# Altium PCB SAMD21_16X10_Layout.PcbDoc
Units mm, origin at the board's own origin, x right, y up, seen from the top; angles counter-clockwise.
Board outline 152.4 x 146.05 mm, 2 copper layers (Top Layer, Bottom Layer); 27 components, 42 nets, 160 pads, 66 vias.
Unrouted connection lines stored in the file: 27.
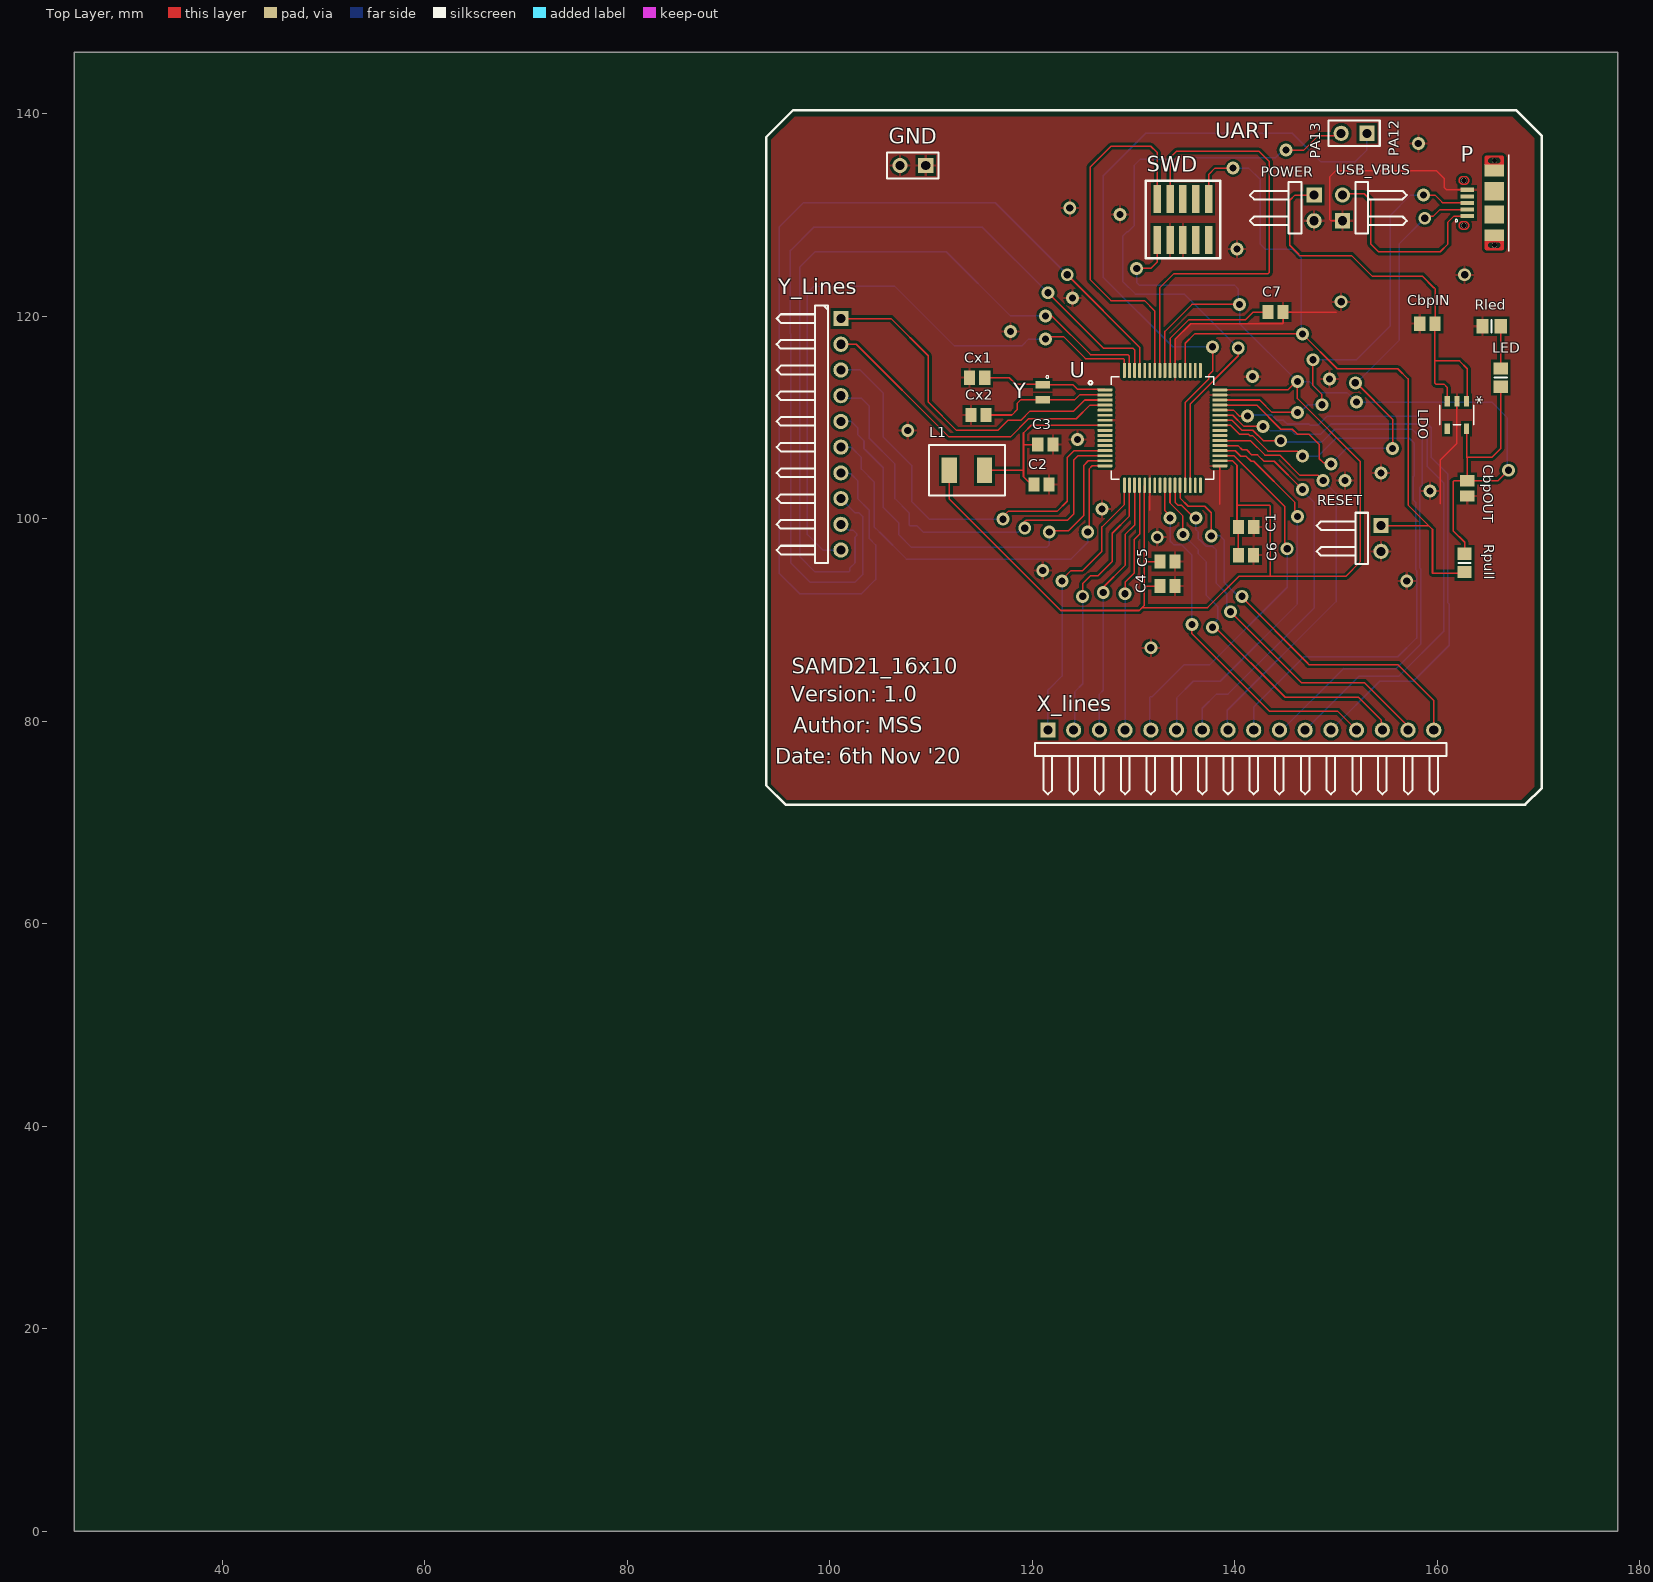
[diagram p0: Top Layer view]
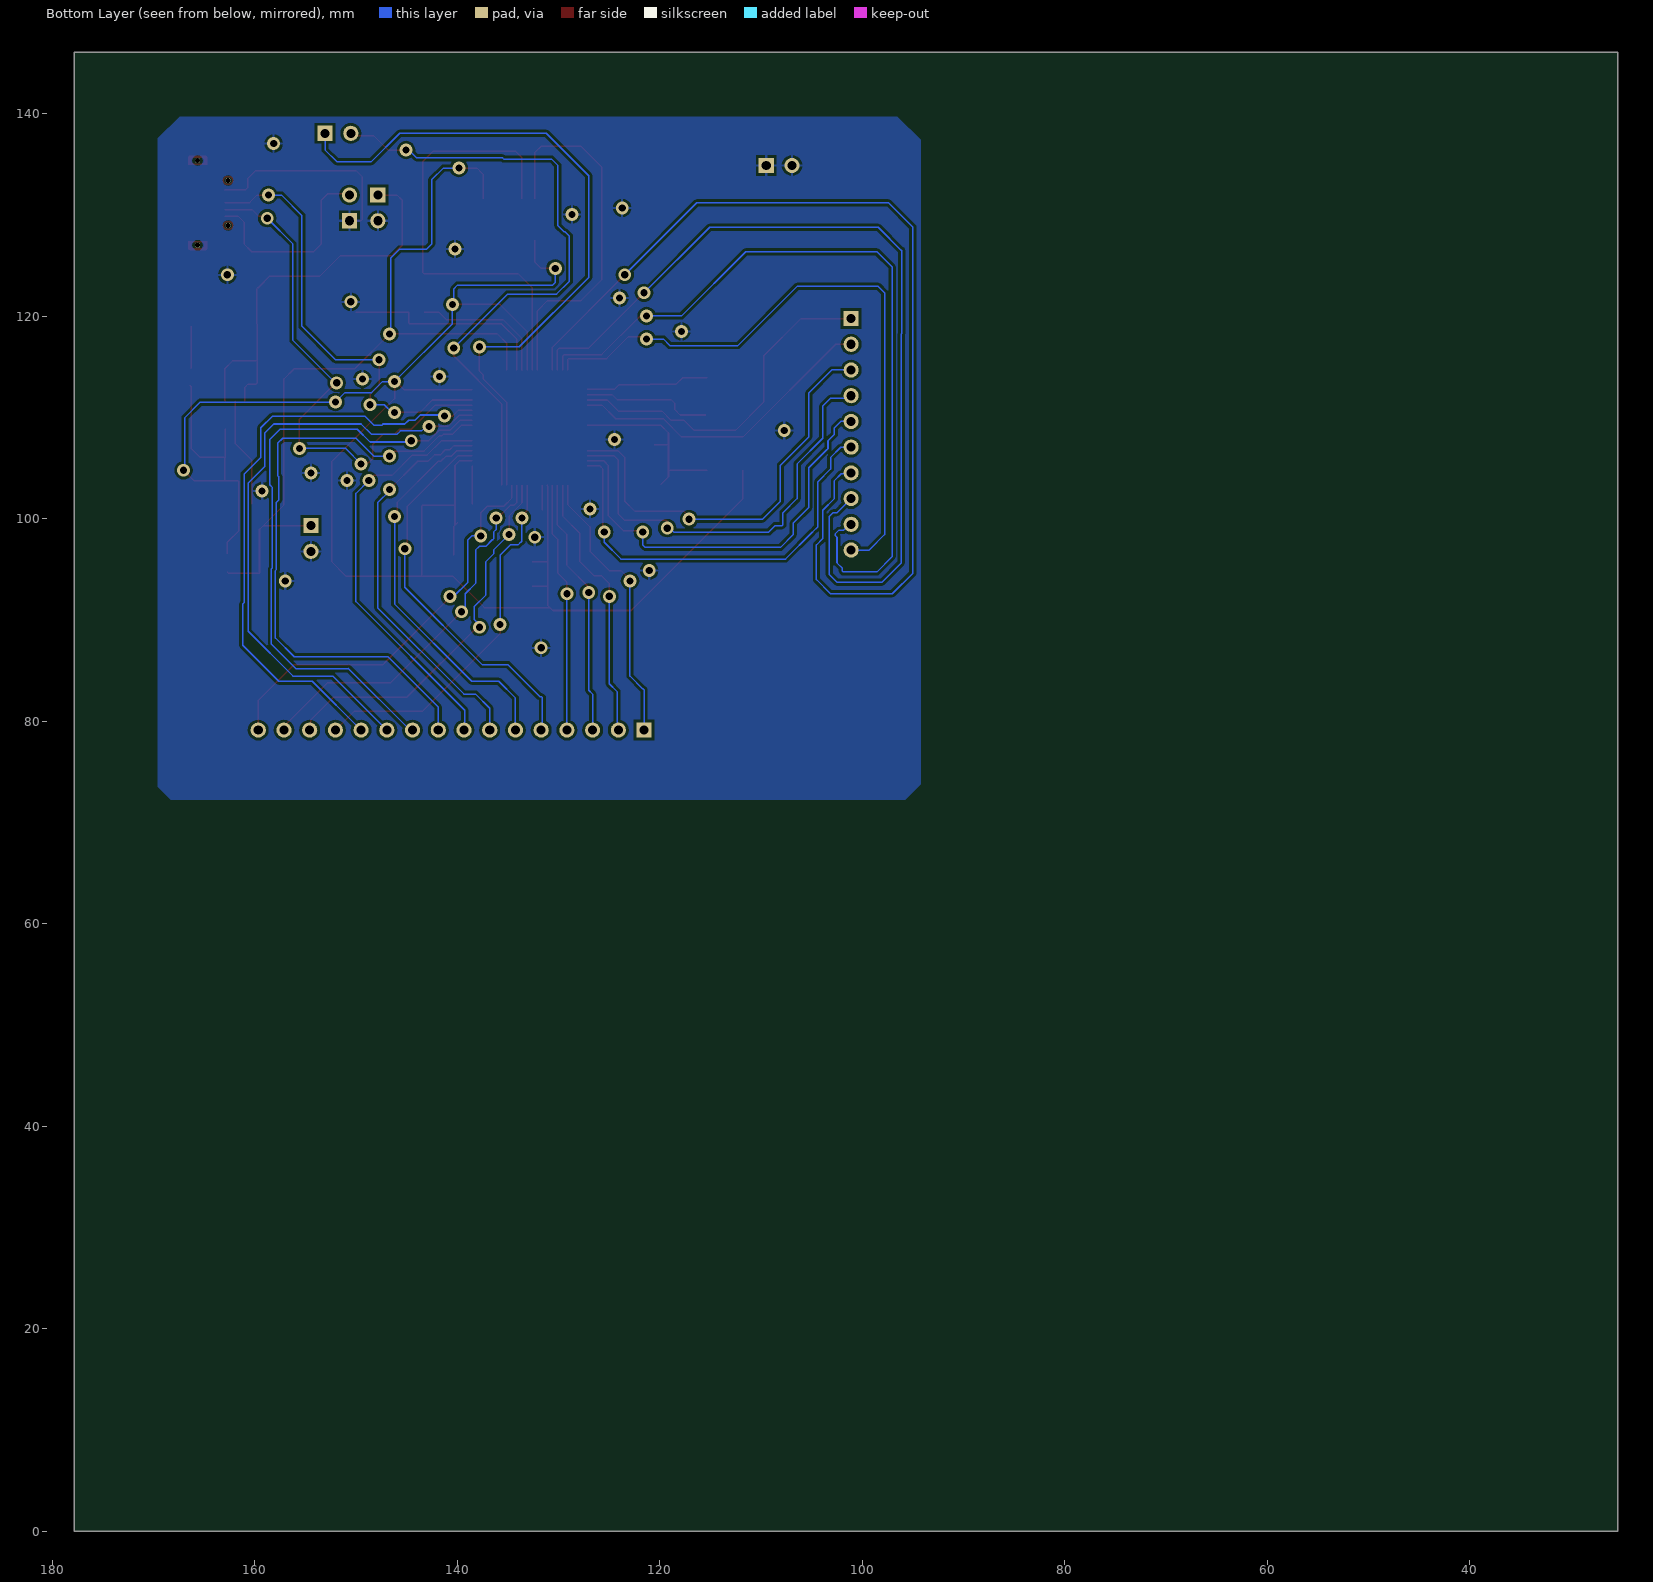
[diagram p1: Bottom Layer view, seen from below]

## Layer stack, top to bottom
Top Solder: solder mask 0.0102, Solder Resist, Dk 3.5
Top Layer: signal copper 0.0356
Dielectric 1: dielectric 0.32, FR-4, Dk 4.8
Bottom Layer: signal copper 0.0356
Bottom Solder: solder mask 0.0102, Solder Resist, Dk 3.5

## Board outline
25.4,0 177.8,0 177.8,146.05 25.4,146.05

## Design rules (kind name [scope] priority, off if disabled: settings)
Clearance [All] p1: gap=0.254 ignorepadtopadclearanceinfootprint=FALSE except(0: Arc-Hole Track-Hole SMDPad-Hole THPad-Hole Via-Hole Fill-Hole Poly-Hole Region-Hole Text-Hole)
PolygonConnect [All] p1: connectstyle=Relief reliefconductorwidth=0.254 reliefentries=4 polygonreliefangle="90 Angle" airgapwidth=0.254
RoomDefinition SAMD21_16X10_schematic [InComponentClass('SAMD21_16X10_schematic')] p1: confinementstyle=ConfineIn formatcopy=TRUE lockcomponents=FALSE outline 90.424,68.199 175.26,68.199 175.26,144.145 90.424,144.145
RoutingVias [All] p1: holewidth=0.711 width=1.27 viastyle="Through Hole" minholewidth=0.711 minwidth=1.27 maxholewidth=0.711 maxwidth=1.27
SolderMaskExpansion [All] p1: expansion=0.102 istentingtop=FALSE
Width [All] p1: maxlimit=0.254 minlimit=0.1 preferedwidth=0.254
30 further rules are at their usual default settings.

## Components (designator, comment, footprint, x,y, rotation, side; value= is the part's Value field where it differs from the comment)
C1 "Cap Pol3" C0805 141.109,99.187 r0 top value=10uF
C2 "Cap Pol3" C0805 120.904,103.378 r0 top value=100nF
C3 "Cap Pol3" C0805 121.285,107.315 r0 top value=10uF
C4 "Cap Pol3" C0805 133.35,93.345 r0 top value=100nF
C5 "Cap Pol3" C0805 133.35,95.758 r0 top value=100nF
C6 "Cap Pol3" C0805 141.097,96.393 r0 top value=100nF
C7 "Cap Pol3" C0805 144.018,120.396 r0 top value=1uF
CbpIN "Cap Pol3" C0805 159.004,119.253 r180 top value=1uF
CbpOUT "Cap Pol3" C0805 162.941,102.997 r270 top value=1uF
Cx1 "Cap Pol3" C0805 114.554,113.919 r180 top value=25pF
Cx2 "Cap Pol3" C0805 114.681,110.236 r180 top value=25pF
GND "Header 2" HDR1X2 109.474,134.874 r180 top
L1 "SRP4012TA-100M" Inductor 113.538,104.775 r180 top
LDO "AP2112K-3.3TRG1" SOT_RG1_DIO 161.925,110.236 r270 top
LED "Res Thermal" 6-0805_N 166.243,113.93 r90 top
P "0475890001" MOLEX_0475890001 165.616,131.176 r90 top
POWER "Header 2H" HDR1X2H 147.828,131.953 r270 top
RESET "Header 2H" HDR1X2H 154.432,99.314 r270 top
Rled "Res Thermal" 6-0805_N 165.354,118.999 r180 top
Rpull "Res Thermal" 6-0805_N 162.687,95.631 r270 top
SWD "FTSH-105-01-XXX-DV-K" FTSH-105-01-XXX-DV-K 134.874,129.54 r0 top
U "ATSAMD21J18A-AU" QFP80P1600X1600X120-64N 132.842,108.966 r0 top
UART "Header 2" HDR1X2 153.035,138.049 r180 top
USB_VBUS "Header 2H" HDR1X2H 150.622,129.413 r90 top
X_lines "Header 16H" HDR1X16H 121.539,79.121 r0 top
Y "ABS06-32.768KHZ-T" XTAL_ABS06-32.768KHZ-T 121.031,112.49 r270 top
Y_Lines "Header 10H" HDR1X10H 101.092,119.761 r270 top

## Footprints (in the part's own frame and the unit in brackets; to place one, negate y for a bottom-side part, rotate by r counter-clockwise, add the part's x,y. Pads: shape width x height; smd on the part's side, far side on the other; paste and mask are expansions set on the pad)
6-0805_N [mm] "Chip Resistor, Body 2.0x1.2mm, IPC Medium Density"
  rect 1.2x1.4 smd: 1(-0.9,0) 2(0.9,0)
  silkscreen extent 0,-0.6 0,0.6, body extent -1.07,-0.7 1.07,0.7, height 0.7
C0805 [mm] "Chip Capacitor, Body 2.0x1.3mm, IPC High Density"
  rect 1.1x1.4 smd: 1(-0.75,0) 2(0.75,0)
  body extent -1.1,-0.72 1.1,0.72, height 1.4
FTSH-105-01-XXX-DV-K [mil]
  rect 29x110 smd mask+2: 1(-100,-80) 2(-100,80) 3(-50,-80) 4(-50,80) 5(0,-80) 6(0,80) 7(50,-80) 8(50,80) 9(100,-80) 10(100,80)
  silkscreen extent -145,-150 145,150
HDR1X2 [mm] "Connector; Header; 2 Position"
  rect 1.5x1.5 hole 0.9: 1(0,0)
  round 1.5 hole 0.9: 2(2.54,0)
  silkscreen extent -1.27,-1.27 3.81,1.27
HDR1X2H [mm] "Connector; Header; 2 Position; Right Angle"
  rect 1.5x1.5 hole 0.9: 1(0,0)
  round 1.5 hole 0.9: 2(2.54,0)
  silkscreen extent -1.27,-6.35 3.81,-1.27
HDR1X10H [mm] "Connector; Header; 10 Position; Right Angle"
  rect 1.5x1.5 hole 0.9: 1(0,0)
  round 1.5 hole 0.9: 2(2.54,0) 3(5.08,0) 4(7.62,0) 5(10.16,0) 6(12.7,0) 7(15.24,0) 8(17.78,0) 9(20.32,0) 10(22.86,0)
  silkscreen extent -1.27,-6.35 24.13,-1.27
HDR1X16H [mm] "Connector; Header; 16 Position; Right Angle"
  rect 1.5x1.5 hole 0.9: 1(0,0)
  round 1.5 hole 0.9: 2(2.54,0) 3(5.08,0) 4(7.62,0) 5(10.16,0) 6(12.7,0) 7(15.24,0) 8(17.78,0) 9(20.32,0) 10(22.86,0) 11(25.4,0) 12(27.94,0) 13(30.48,0) 14(33.02,0) 15(35.56,0) 16(38.1,0)
  silkscreen extent -1.27,-6.35 39.37,-1.27
Inductor [mm]
  rect 1.5x2.5 smd: 1(-1.75,0) 2(1.75,0)
  silkscreen extent -3.75,-2.5 3.75,2.5
MOLEX_0475890001 [mm]
  rect 0.4x1.35 smd: 1(-1.3,2.675) 2(-0.65,2.675) 3(0,2.675) 4(0.65,2.675) 5(1.3,2.675)
  rect 1.175x1.9 smd: 6(-3.187,0) 9(3.187,0)
  rect 1.8x1.9 smd: 7(-1.15,0) 8(1.15,0)
  round 0.5 hole 0.5 unplated: ""(-4.175,0) ""(-2.225,3) ""(2.225,3) ""(4.175,0)
  Top Layer region: 3.875,0.35 3.875,-0.35 3.875,-0.95 3.775,-0.95 3.775,0.95 3.875,0.95
  Top Layer region: 187 vertices and 0 holes, not listed, extent 3.875,-0.95 4.675,0.95
  Top Layer region: -3.775,-0.95 -3.875,-0.95 -3.875,-0.35 -3.875,0.35 -3.875,0.95 -3.775,0.95
  Top Layer region: 2.65,2.9 2.649,2.878 2.648,2.856 2.645,2.834 2.641,2.812 2.636,2.79 2.629,2.769 2.622,2.748 2.613,2.727 2.604,2.707 2.593,2.688 2.581,2.669 2.569,2.65 2.555,2.633 2.541,2.616 2.526,2.599 2.509,2.584 2.492,2.57 2.475,2.556 2.456,2.544 2.438,2.532 2.418,2.521 2.398,2.512 2.377,2.503 2.356,2.496 2.335,2.489 2.313,2.484 2.291,2.48 2.269,2.477 2.247,2.476 2.225,2.475 2.203,2.476 2.181,2.477 2.159,2.48 2.137,2.484 2.115,2.489 2.094,2.496 2.073,2.503 2.052,2.512 2.032,2.521 2.013,2.532 1.994,2.544 1.975,2.556 1.958,2.57 1.941,2.584 1.924,2.599 1.909,2.616 1.895,2.633 1.881,2.65 1.869,2.669 1.857,2.688 1.846,2.707 1.837,2.727 1.828,2.748 1.821,2.769 1.814,2.79 1.809,2.812 1.805,2.834 1.802,2.856 1.801,2.878 1.8,2.9 1.8,3 1.9,3 1.9,2.9 1.9,2.883 1.902,2.866 1.904,2.849 1.907,2.832 1.911,2.816 1.916,2.8 1.922,2.784 1.928,2.768 1.935,2.752 1.944,2.738 1.952,2.723 1.962,2.709 1.972,2.695 1.983,2.683 1.995,2.67 2.008,2.658 2.02,2.647 2.034,2.637 2.048,2.627 2.063,2.619 2.077,2.61 2.093,2.603 2.109,2.597 2.125,2.591 2.141,2.586 2.157,2.582 2.174,2.579 2.191,2.577 2.208,2.575 2.225,2.575 2.242,2.575 2.259,2.577 2.276,2.579 2.293,2.582 2.309,2.586 2.325,2.591 2.341,2.597 2.357,2.603 2.373,2.61 2.388,2.619 2.402,2.627 2.416,2.637 2.43,2.647 2.442,2.658 2.455,2.67 2.467,2.683 2.478,2.695 2.488,2.709 2.498,2.723 2.506,2.738 2.515,2.752 2.522,2.768 2.528,2.784 2.534,2.8 2.539,2.816 2.543,2.832 2.546,2.849 2.548,2.866 2.55,2.883 2.55,2.9 2.55,3 2.65,3
  Top Layer region: 2.247,3.524 2.269,3.523 2.291,3.52 2.313,3.516 2.335,3.511 2.356,3.504 2.377,3.497 2.398,3.488 2.418,3.479 2.438,3.468 2.456,3.456 2.475,3.444 2.492,3.43 2.509,3.416 2.526,3.401 2.541,3.384 2.555,3.367 2.569,3.35 2.581,3.331 2.593,3.313 2.604,3.293 2.613,3.273 2.622,3.252 2.629,3.231 2.636,3.21 2.641,3.188 2.645,3.166 2.648,3.144 2.649,3.122 2.65,3.1 2.65,3 2.55,3 2.55,3.1 2.55,3.117 2.548,3.134 2.546,3.151 2.543,3.168 2.539,3.184 2.534,3.2 2.528,3.216 2.522,3.232 2.515,3.248 2.506,3.263 2.498,3.277 2.488,3.291 2.478,3.305 2.467,3.317 2.455,3.33 2.442,3.342 2.43,3.353 2.416,3.363 2.402,3.373 2.388,3.381 2.373,3.39 2.357,3.397 2.341,3.403 2.325,3.409 2.309,3.414 2.293,3.418 2.276,3.421 2.259,3.423 2.242,3.425 2.225,3.425 2.208,3.425 2.191,3.423 2.174,3.421 2.157,3.418 2.141,3.414 2.125,3.409 2.109,3.403 2.093,3.397 2.077,3.39 2.063,3.381 2.048,3.373 2.034,3.363 2.02,3.353 2.008,3.342 1.995,3.33 1.983,3.317 1.972,3.305 1.962,3.291 1.952,3.277 1.944,3.263 1.935,3.248 1.928,3.232 1.922,3.216 1.916,3.2 1.911,3.184 1.907,3.168 1.904,3.151 1.902,3.134 1.9,3.117 1.9,3.1 1.9,3 1.8,3 1.8,3.1 1.801,3.122 1.802,3.144 1.805,3.166 1.809,3.188 1.814,3.21 1.821,3.231 1.828,3.252 1.837,3.273 1.846,3.293 1.857,3.313 1.869,3.331 1.881,3.35 1.895,3.367 1.909,3.384 1.924,3.401 1.941,3.416 1.958,3.43 1.975,3.444 1.994,3.456 2.013,3.468 2.032,3.479 2.052,3.488 2.073,3.497 2.094,3.504 2.115,3.511 2.137,3.516 2.159,3.52 2.181,3.523 2.203,3.524 2.225,3.525
  Top Layer region: -1.8,2.9 -1.801,2.878 -1.802,2.856 -1.805,2.834 -1.809,2.812 -1.814,2.79 -1.821,2.769 -1.828,2.748 -1.837,2.727 -1.846,2.707 -1.857,2.688 -1.869,2.669 -1.881,2.65 -1.895,2.633 -1.909,2.616 -1.924,2.599 -1.941,2.584 -1.958,2.57 -1.975,2.556 -1.994,2.544 -2.013,2.532 -2.032,2.521 -2.052,2.512 -2.073,2.503 -2.094,2.496 -2.115,2.489 -2.137,2.484 -2.159,2.48 -2.181,2.477 -2.203,2.476 -2.225,2.475 -2.247,2.476 -2.269,2.477 -2.291,2.48 -2.313,2.484 -2.335,2.489 -2.356,2.496 -2.377,2.503 -2.398,2.512 -2.418,2.521 -2.438,2.532 -2.456,2.544 -2.475,2.556 -2.492,2.57 -2.509,2.584 -2.526,2.599 -2.541,2.616 -2.555,2.633 -2.569,2.65 -2.581,2.669 -2.593,2.688 -2.604,2.707 -2.613,2.727 -2.622,2.748 -2.629,2.769 -2.636,2.79 -2.641,2.812 -2.645,2.834 -2.648,2.856 -2.649,2.878 -2.65,2.9 -2.65,3 -2.55,3 -2.55,2.9 -2.55,2.883 -2.548,2.866 -2.546,2.849 -2.543,2.832 -2.539,2.816 -2.534,2.8 -2.528,2.784 -2.522,2.768 -2.515,2.752 -2.506,2.738 -2.498,2.723 -2.488,2.709 -2.478,2.695 -2.467,2.683 -2.455,2.67 -2.442,2.658 -2.43,2.647 -2.416,2.637 -2.402,2.627 -2.388,2.619 -2.373,2.61 -2.357,2.603 -2.341,2.597 -2.325,2.591 -2.309,2.586 -2.293,2.582 -2.276,2.579 -2.259,2.577 -2.242,2.575 -2.225,2.575 -2.208,2.575 -2.191,2.577 -2.174,2.579 -2.157,2.582 -2.141,2.586 -2.125,2.591 -2.109,2.597 -2.093,2.603 -2.077,2.61 -2.063,2.619 -2.048,2.627 -2.034,2.637 -2.02,2.647 -2.008,2.658 -1.995,2.67 -1.983,2.683 -1.972,2.695 -1.962,2.709 -1.952,2.723 -1.944,2.738 -1.935,2.752 -1.928,2.768 -1.922,2.784 -1.916,2.8 -1.911,2.816 -1.907,2.832 -1.904,2.849 -1.902,2.866 -1.9,2.883 -1.9,2.9 -1.9,3 -1.8,3
  Top Layer region: -2.203,3.524 -2.181,3.523 -2.159,3.52 -2.137,3.516 -2.115,3.511 -2.094,3.504 -2.073,3.497 -2.052,3.488 -2.032,3.479 -2.013,3.468 -1.994,3.456 -1.975,3.444 -1.958,3.43 -1.941,3.416 -1.924,3.401 -1.909,3.384 -1.895,3.367 -1.881,3.35 -1.869,3.331 -1.857,3.313 -1.846,3.293 -1.837,3.273 -1.828,3.252 -1.821,3.231 -1.814,3.21 -1.809,3.188 -1.805,3.166 -1.802,3.144 -1.801,3.122 -1.8,3.1 -1.8,3 -1.9,3 -1.9,3.1 -1.9,3.117 -1.902,3.134 -1.904,3.151 -1.907,3.168 -1.911,3.184 -1.916,3.2 -1.922,3.216 -1.928,3.232 -1.935,3.248 -1.944,3.263 -1.952,3.277 -1.962,3.291 -1.972,3.305 -1.983,3.317 -1.995,3.33 -2.008,3.342 -2.02,3.353 -2.034,3.363 -2.048,3.373 -2.063,3.381 -2.077,3.39 -2.093,3.397 -2.109,3.403 -2.125,3.409 -2.141,3.414 -2.157,3.418 -2.174,3.421 -2.191,3.423 -2.208,3.425 -2.225,3.425 -2.242,3.425 -2.259,3.423 -2.276,3.421 -2.293,3.418 -2.309,3.414 -2.325,3.409 -2.341,3.403 -2.357,3.397 -2.373,3.39 -2.388,3.381 -2.402,3.373 -2.416,3.363 -2.43,3.353 -2.442,3.342 -2.455,3.33 -2.467,3.317 -2.478,3.305 -2.488,3.291 -2.498,3.277 -2.506,3.263 -2.515,3.248 -2.522,3.232 -2.528,3.216 -2.534,3.2 -2.539,3.184 -2.543,3.168 -2.546,3.151 -2.548,3.134 -2.55,3.117 -2.55,3.1 -2.55,3 -2.65,3 -2.65,3.1 -2.649,3.122 -2.648,3.144 -2.645,3.166 -2.641,3.188 -2.636,3.21 -2.629,3.231 -2.622,3.252 -2.613,3.273 -2.604,3.293 -2.593,3.313 -2.581,3.331 -2.569,3.35 -2.555,3.367 -2.541,3.384 -2.526,3.401 -2.509,3.416 -2.492,3.43 -2.475,3.444 -2.456,3.456 -2.438,3.468 -2.418,3.479 -2.398,3.488 -2.377,3.497 -2.356,3.504 -2.335,3.511 -2.313,3.516 -2.291,3.52 -2.269,3.523 -2.247,3.524 -2.225,3.525
  Top Layer region: 187 vertices and 0 holes, not listed, extent -4.675,-0.95 -3.875,0.95
  silkscreen extent -4.75,-1.45 4.75,3.88
QFP80P1600X1600X120-64N [mm]
  rrect50% 1.49x0.28 smd: 1(-5.67,3.75) 2(-5.67,3.25) 3(-5.67,2.75) 4(-5.67,2.25) 5(-5.67,1.75) 6(-5.67,1.25) 7(-5.67,0.75) 8(-5.67,0.25) 9(-5.67,-0.25) 10(-5.67,-0.75) 11(-5.67,-1.25) 12(-5.67,-1.75) 13(-5.67,-2.25) 14(-5.67,-2.75) 15(-5.67,-3.25) 16(-5.67,-3.75) 33(5.67,-3.75) 34(5.67,-3.25) 35(5.67,-2.75) 36(5.67,-2.25) 37(5.67,-1.75) 38(5.67,-1.25) 39(5.67,-0.75) 40(5.67,-0.25) 41(5.67,0.25) 42(5.67,0.75) 43(5.67,1.25) 44(5.67,1.75) 45(5.67,2.25) 46(5.67,2.75) 47(5.67,3.25) 48(5.67,3.75)
  rrect50% 0.28x1.49 smd: 17(-3.75,-5.67) 18(-3.25,-5.67) 19(-2.75,-5.67) 20(-2.25,-5.67) 21(-1.75,-5.67) 22(-1.25,-5.67) 23(-0.75,-5.67) 24(-0.25,-5.67) 25(0.25,-5.67) 26(0.75,-5.67) 27(1.25,-5.67) 28(1.75,-5.67) 29(2.25,-5.67) 30(2.75,-5.67) 31(3.25,-5.67) 32(3.75,-5.67) 49(3.75,5.67) 50(3.25,5.67) 51(2.75,5.67) 52(2.25,5.67) 53(1.75,5.67) 54(1.25,5.67) 55(0.75,5.67) 56(0.25,5.67) 57(-0.25,5.67) 58(-0.75,5.67) 59(-1.25,5.67) 60(-1.75,5.67) 61(-2.25,5.67) 62(-2.75,5.67) 63(-3.25,5.67) 64(-3.75,5.67)
  silkscreen extent -7.28,-5.05 5.05,5.05
SOT_RG1_DIO [mil]
  rect 39.5x20 smd paste+0 mask+0: 1(-53.25,37.4) 2(-53.25,0) 3(-53.25,-37.4) 4(53.25,-37.4) 5(53.25,37.4)
  silkscreen extent -39,-66 39,66, body extent 0,0 10,10, height 10
XTAL_ABS06-32.768KHZ-T [mm]
  rect 0.75x1.4 smd: 1(-0.73,0) 2(0.73,0)
  silkscreen extent -1.64,0.31 -1.36,0.59

## Part data
C1 C2 C3 C4 C5 C6 C7 CbpIN CbpOUT Cx1 Cx2: "Polarized Capacitor (Surface Mount)", LatestRevisionDate=29-May-2009, LatestRevisionNote="IPC-7351 Footprint Added.", PackageDescription="Chip Capacitor", PackageReference=C0805, Published=8-Jun-2000, Publisher="Altium Limited"
GND UART: "Header, 2-Pin", LatestRevisionDate=17-Jul-2002, LatestRevisionNote="Re-released for DXP Platform.", Publisher="Altium Limited"
L1: "Inductor"
LDO: "No Description Available", Built_By=EMA_Matt, Copyright="Copyright (C) 2018 Accelerated Designs. All rights reserved", Manufacturer_Part_Number=AP2112K-3.3TRG1, RefDes=RefDes, SourceLibrary=Diodes_Inc_2019-12-05, Type=DEV, Vendor="Diodes Inc"
LED Rled Rpull: "Thermistor", Code_IPC=RESC2012, LatestRevisionDate=29-May-2009, LatestRevisionNote="IPC-7351 Footprint Added.", PackageDescription="Chip Resistor 0805 Case Size", PackageReference=6-0805, PackageVersion=Mar-2003, Published=24-Mar-1999, Publisher="Altium Limited"
P: "USB - micro AB Receptacle Connector 5 Position Surface Mount, Right Angle; Through Hole", Package=None, Digi-Key_Part_Number=WM17143CT-ND, Digi-Key_Purchase_URL=https://www.digikey.com/product-detail/en/molex/0475890001/WM17143CT-ND/1832255?utm_source=snapeda&utm_medium=aggregator&utm_campaign=symbol, MF=Molex, MP=0475890001, SnapEDA_Link=https://www.snapeda.com/parts/0475890001/Molex/view-part/379420/?ref=snap
POWER RESET USB_VBUS: "Header, 2-Pin, Right Angle", LatestRevisionDate=17-Jul-2002, LatestRevisionNote="Re-released for DXP Platform.", Publisher="Altium Limited"
SWD: "TERMINAL STRIP, .050\"(1.27mm) PITCH, 10 PINS, KEYED", MANUFACTURER=SAMTEC, CREATED="November 30, 2016 - Wendy Xin", PCB DECAL=FTSH-105-01-XXX-DV-K
U: "ARMÂ® CortexÂ®-M0+ SAM D21J Microcontroller IC 32-Bit 48MHz 256KB _256K x 8_ FLASH 64-TQFP _10x10_", Package="TQFP-64 Microchip", Availability=Unavailable, MF=Microchip, MP=ATSAMD21J18A-AU, Price=None, SnapEDA_Link=https://www.snapeda.com/parts/ATSAMD21J18A-AU/Microchip/view-part/588919/?ref=snap
X_lines: "Header, 16-Pin, Right Angle", LatestRevisionDate=17-Jul-2002, LatestRevisionNote="Re-released for DXP Platform.", Publisher="Altium Limited"
Y: "32.768kHz Â±20ppm Crystal 12.5pF 90 kOhms 2-SMD, No Lead", Package="SMD-2 Abracon", Availability=Unavailable, DigiKey-Purchase-URL=https://snapeda.com/shop?store=DigiKey&id=108994, MF=Abracon, MP=ABS06-32.768KHZ-T, Price=None, SnapEDA_Link=https://www.snapeda.com/parts/ABS06-32.768KHZ-T/Abracon%20LLC/view-part/108994/?ref=snap
Y_Lines: "Header, 10-Pin, Right Angle", LatestRevisionDate=17-Jul-2002, LatestRevisionNote="Re-released for DXP Platform.", Publisher="Altium Limited"

## Via types
v1: diameter 1.27, hole 0.711, Top Layer to Bottom Layer, 66 vias

## Nets (pads, with @x,y where several pads share a name; then routed paths per layer and width w, separated by ;. In a path a pad name is that pad's centre, name@x,y a point inside that pad or via, vN(x,y) a via of type N, cw(c..) or ccw(c..) an arc to the next point about the centre after c; other vN are vias at no path point)
GND: C1.2 C2.2 C3.2 C4.2 C5.2 C6.2 C7.2 CbpIN.2 CbpOUT.2 Cx1.2 Cx2.2 GND.1 GND.2 LDO.2 P.5 POWER.2 RESET.2 Rled.2 SWD.3 SWD.5 U.7 U.22 U.33 U.47 U.54 USB_VBUS.1 | length 58.4
  Top Layer w0.15: 131.572,100.838 131.592,100.858 U.22 ; U.54 134.092,117.709 135.636,119.253 144.68,119.253 144.768,119.341 C7.2 149.987,120.396 ; 138.512,101.428 U.33 ; USB_VBUS.1 149.479,129.413 149.352,129.54 149.352,133.731 149.987,134.366 159.893,134.366 160.655,133.604 160.655,132.715 160.909,132.461 162.926,132.461 P.5 ; 160.274,101.473 160.274,105.791 161.925,107.442 LDO.2
  other v1: 131.699,87.249 156.972,93.853 121.031,94.869 132.334,98.171 126.873,100.965 159.258,102.743 150.876,103.759 154.432,104.521 124.46,107.823 107.696,108.712 149.352,113.792 141.732,114.046 117.856,118.491 150.495,121.412 123.952,121.793 162.687,124.079 140.208,126.619 128.651,130.048 123.698,130.683 158.115,137.033
NetC2_1: C2.1 C3.1 L1.1 U.8 | length 19
  Top Layer w0.15: L1.1 119.126,104.775 ; C2.1@119.888,103.378 119.126,104.14 119.126,104.775 ; C3.1 119.126,107.315 ; U.8 127.168,109.22 119.888,109.22 119.126,108.458 119.126,107.315 ; 119.126,104.775 119.126,107.315
NetC7_1: C7.1 U.55 | length 13.9
  Top Layer w0.15: U.55 133.604,114.648 133.604,117.792 135.469,119.657 141.079,119.657 141.818,120.396 C7.1
NetCbpIN_1: CbpIN.1 LDO.1 LDO.3 POWER.1 | length 42.1
  Top Layer w0.15: POWER.1 145.923,131.953 145.415,131.445 145.415,127 146.304,126.111 146.304,126.072 146.392,125.984 151.511,125.984 153.543,123.952 158.496,123.952 159.639,122.809 159.678,122.809 159.766,122.721 159.766,119.265 CbpIN.1 159.754,115.57 ; LDO.3 160.975,112.964 160.655,113.284 159.842,113.284 159.754,113.372 159.754,115.57 ; LDO.1 162.941,111.655 162.941,114.808 162.179,115.57 159.754,115.57
NetCx1_1: Cx1.1 U.1 Y.1 | length 12.4
  Top Layer w0.15: Cx1.1 117.729,113.919 118.364,113.284 120.967,113.284 Y.1 124.016,113.22 124.46,112.776 127.112,112.776 U.1
NetCx2_1: Cx2.1 U.2 Y.2 | length 12.9
  Top Layer w0.15: Cx2.1 117.983,110.236 118.491,110.744 118.491,111.379 118.872,111.76 Y.2 124.206,111.76 124.662,112.216 U.2
NetLED_2: LED.2 Rled.1 | length 4.2
  Top Layer w0.15: LED.2 166.254,114.841 Rled.1
NetP_1: P.1 USB_VBUS.2 | length 20
  Top Layer w0.15: USB_VBUS.2 150.749,132.08 152.781,132.08 153.416,131.445 153.416,127.127 154.178,126.365 160.274,126.365 161.036,127.127 161.036,129.286 161.626,129.876 P.1
NetP_2: P.2 U.45 | length 52.4
  Top Layer w0.15: U.45 142.149,111.216 144.526,108.839 145.669,108.839 146.177,108.331 147.32,108.331 148.336,107.315 148.336,105.918 148.717,105.537 149.352,105.537 v1(149.479,105.41) ; v1(151.892,113.411) 151.985,113.411 155.575,109.821 v1(155.575,106.934) ; v1(158.75,129.667) 158.964,129.881 159.599,129.881 160.244,130.526 P.2
  Bottom Layer w0.15: v1(149.479,105.41) 151.003,106.934 v1(155.575,106.934) ; v1@152.146,113.538 156.21,117.602 156.21,127.127 v1(158.75,129.667)
NetP_3: P.3 U.46 | length 44.4
  Top Layer w0.15: U.46 142.45,111.716 143.676,110.49 v1(146.177,110.49) ; v1(147.701,115.697) 147.701,113.157 148.59,112.268 v1(148.59,111.252) ; v1(158.623,131.953) 159.766,131.953 160.448,131.271 160.448,131.264 160.535,131.176 P.3
  Bottom Layer w0.15: v1(146.177,110.49) 146.431,110.49 147.193,111.252 v1(148.59,111.252) ; v1(147.701,115.697) 152.019,115.697 155.321,118.999 155.321,129.921 157.353,131.953 v1(158.623,131.953)
NetRESET_1: RESET.1 Rpull.2 SWD.10 U.52 | length 81.8
  Top Layer w0.15: U.52 135.092,117.312 136.017,118.237 v1(146.685,118.237) 150.114,114.808 156.083,114.808 157.099,113.792 157.099,101.346 159.131,99.314 ; SWD.10 137.414,133.985 138.049,134.62 v1(139.827,134.62) ; RESET.1 159.131,99.314 ; Rpull.2 162.571,94.615 159.512,94.615 159.512,98.933 159.131,99.314
  Bottom Layer w0.15: v1(139.827,134.62) 141.351,134.62 142.494,133.477 142.494,127.127 143.002,126.619 145.669,126.619 146.558,125.73 146.558,118.364 v1(146.685,118.237)
NetSWD_2: SWD.2 U.58 | length 37
  Top Layer w0.15: U.58 132.092,120.511 131.064,121.539 127.762,121.539 125.73,123.571 125.73,134.747 127.762,136.779 131.699,136.779 132.334,136.144 SWD.2
NetSWD_4: SWD.4 U.57 | length 45.1
  Top Layer w0.15: U.57 132.592,122.813 133.985,124.206 143.295,124.206 143.383,124.294 143.383,135.255 142.367,136.271 134.239,136.271 133.604,135.636 SWD.4
NetU_3: U.3 Y_Lines.1 | length 34.6
  Top Layer w0.15: Y_Lines.1 106.045,119.761 109.728,116.078 109.728,111.506 112.522,108.712 116.586,108.712 117.602,109.728 118.872,109.728 119.761,110.617 124.079,110.617 125.178,111.716 U.3
NetU_4: U.4 Y_Lines.2 | length 31.2
  Top Layer w0.15: Y_Lines.2 102.616,117.221 111.76,108.077 117.856,108.077 119.634,109.855 124.333,109.855 125.694,111.216 U.4
NetU_13: U.13 Y_Lines.3 | length 42.4
  Top Layer w0.15: v1@117.221,99.822 117.221,100.33 117.602,100.711 122.428,100.711 123.444,101.727 123.444,106.045 124.115,106.716 U.13
  Bottom Layer w0.15: Y_Lines.3 102.997,114.681 105.283,112.395 105.283,108.077 108.077,105.283 108.077,101.727 109.855,99.949 v1(117.094,99.949)
NetU_14: U.14 Y_Lines.4 | length 42.9
  Top Layer w0.15: v1(119.253,99.06) 119.253,99.734 119.341,99.822 123.444,99.822 124.079,100.457 124.079,105.791 124.504,106.216 U.14
  Bottom Layer w0.15: Y_Lines.4 101.346,111.887 103.124,111.887 103.886,111.125 103.886,107.95 106.426,105.41 106.426,101.981 107.823,100.584 107.823,99.402 107.911,99.314 108.585,99.314 109.22,98.679 118.605,98.679 118.986,99.06 v1(119.253,99.06)
NetU_15: U.15 Y_Lines.5 | length 42.7
  Top Layer w0.15: v1@121.539,98.298 121.539,98.552 v1(121.666,98.679) 121.793,98.806 123.571,98.806 125.095,100.33 125.095,105.283 125.528,105.716 U.15
  Bottom Layer w0.15: Y_Lines.5 102.108,109.601 102.743,108.966 102.743,108.331 103.378,107.696 103.378,106.895 103.466,106.807 103.505,106.807 105.283,105.029 105.283,101.092 106.807,99.568 106.807,98.425 108.077,97.155 121.412,97.155 121.666,97.409 v1(121.666,98.679)
NetU_16: U.16 Y_Lines.6 | length 42.5
  Top Layer w0.15: v1@125.222,98.171 125.603,98.552 125.603,104.902 125.917,105.216 U.16
  Bottom Layer w0.15: Y_Lines.6 102.108,107.061 103.124,106.045 103.124,104.902 104.394,103.632 104.394,99.187 104.902,98.679 ; 104.926,98.655 107.569,96.012 123.825,96.012 125.476,97.663 v1(125.476,98.679)
NetU_17: U.17 X_lines.1 | length 28.3
  Top Layer w0.15: v1@122.809,93.599 122.936,93.726 v1(122.936,93.853) 122.936,93.98 123.825,94.869 124.968,94.869 126.873,96.774 126.873,99.187 129.092,101.406 U.17
  Bottom Layer w0.15: X_lines.1 121.539,83.097 121.627,83.185 121.666,83.185 122.936,84.455 v1(122.936,93.853)
NetU_18: U.18 X_lines.2 | length 26.9
  Top Layer w0.15: v1(124.968,92.329) 124.968,93.599 125.73,94.361 126.492,94.361 127.889,95.758 127.889,98.552 129.592,100.255 U.18
  Bottom Layer w0.15: X_lines.2 124.206,79.248 124.206,82.931 124.968,83.693 v1(124.968,92.329)
NetU_19: U.19 X_lines.3 | length 25.6
  Top Layer w0.15: v1(127,92.71) 127,93.218 129.159,95.377 129.159,98.425 130.092,99.358 U.19
  Bottom Layer w0.15: X_lines.3 126.619,82.677 127,83.058 v1(127,92.71)
NetU_20: U.20 X_lines.4 | length 24.8
  Top Layer w0.15: v1(129.159,92.583) 129.159,93.726 130.048,94.615 130.048,97.917 130.592,98.461 U.20
  Bottom Layer w0.15: X_lines.4 v1(129.159,92.583)
NetU_25: U.25 X_lines.13 | length 36.6
  Top Layer w0.15: U.25 133.092,100.78 133.604,100.268 v1(133.604,100.076) ; v1(135.763,89.535) 135.763,88.646 143.446,80.962 150.177,80.962 X_lines.13
  Bottom Layer w0.15: v1(133.604,100.076) 133.604,97.751 133.692,97.663 133.731,97.663 133.985,97.409 134.747,97.409 135.763,96.393 v1(135.763,89.535) v1@135.763,89.408
NetU_26: U.26 X_lines.14 | length 37.2
  Top Layer w0.15: U.26 133.592,101.549 134.874,100.267 v1(134.874,98.425) ; v1(137.795,89.281) 138.049,89.281 144.97,82.359 152.209,82.359 154.473,80.096 154.473,79.207 X_lines.14
  Bottom Layer w0.15: v1(134.874,98.425) 136.398,96.901 136.398,96.52 137.16,95.758 137.16,92.456 138.303,91.313 138.303,90.043 v1@137.922,89.662
NetU_27: U.27 X_lines.15 | length 37.6
  Top Layer w0.15: U.27 134.092,101.62 134.366,101.346 134.707,101.346 135.977,100.076 v1(136.144,100.076) ; v1(139.573,90.805) 146.558,83.82 152.781,83.82 156.75,79.851 156.75,79.835 157.099,79.486 X_lines.15
  Bottom Layer w0.15: v1(136.144,100.076) 136.144,98.933 136.398,98.679 136.398,98.005 136.486,97.917 136.525,97.917 137.16,97.282 137.795,97.282 138.176,96.901 138.176,93.599 139.192,92.583 v1@139.192,91.059
NetU_28: U.28 X_lines.16 | length 41.1
  Top Layer w0.15: U.28 134.592,102.032 135.405,101.219 137.033,101.219 137.668,100.584 v1(137.668,98.298) ; v1(140.716,92.329) 140.716,92.202 147.194,85.724 147.194,85.686 147.282,85.598 156.083,85.598 159.639,82.042 X_lines.16
  Bottom Layer w0.15: v1(137.668,98.298) 138.557,98.298 138.938,97.917 138.938,93.726 140.335,92.329 v1@140.462,92.329
NetU_29: U.29 UART.1 | length 69.5
  Top Layer w0.15: U.29 135.092,111.47 137.414,113.792 137.414,114.173 137.795,114.554 v1(137.795,116.967)
  Bottom Layer w0.15: v1(137.795,116.967) 133.858,116.967 127,123.825 127,133.858 131.191,138.049 145.669,138.049 148.463,135.255 151.892,135.255 153.035,136.398 UART.1
NetU_30: U.30 UART.2 | length 63.4
  Top Layer w0.15: U.30 135.592,111.335 140.335,116.078 v1(140.335,116.84) ; v1(145.034,136.398) 146.812,136.398 148.209,137.795 150.241,137.795 UART.2
  Bottom Layer w0.15: v1(140.335,116.84) 135.001,122.174 130.175,122.174 128.905,123.444 128.905,127.889 129.351,128.335 129.452,128.335 130.048,128.931 130.048,134.874 130.683,135.509 135.417,135.509 135.544,135.636 144.018,135.636 144.78,136.398 v1(145.034,136.398)
NetU_35: U.35 X_lines.5 | length 37.7
  Top Layer w0.15: U.35 139.91,106.216 144.907,101.219 v1@144.907,97.155
  Bottom Layer w0.15: X_lines.5 131.572,79.248 131.572,82.335 131.66,82.423 131.826,82.423 135.001,85.598 137.541,85.598 145.161,93.218 v1(145.161,97.028)
NetU_36: U.36 X_lines.6 | length 38.4
  Top Layer w0.15: U.36 140.045,106.716 140.589,106.172 141.097,106.172 141.605,105.664 141.859,105.664 145.923,101.6 145.923,100.851 145.963,100.811 145.963,100.37 v1@145.923,100.33
  Bottom Layer w0.15: X_lines.6 134.239,82.296 135.89,83.947 138.557,83.947 146.177,91.567 v1(146.177,100.203)
NetU_37: U.37 X_lines.7 | length 39.4
  Top Layer w0.15: U.37 140.307,107.216 140.716,106.807 141.16,106.807 141.668,106.299 142.24,106.299 142.875,105.664 143.891,105.664 v1(146.685,102.87)
  Bottom Layer w0.15: X_lines.7 136.779,81.28 138.176,82.677 139.319,82.677 147.828,91.186 147.828,101.6 146.685,102.743 v1(146.685,102.87)
NetU_38: U.38 X_lines.8 | length 41.5
  Top Layer w0.15: U.38 141.522,107.716 142.962,106.276 144.422,106.276 146.431,104.267 148.209,104.267 v1(148.717,103.759)
  Bottom Layer w0.15: X_lines.8 139.254,79.186 139.254,81.088 149.987,91.821 149.987,102.489 v1(148.717,103.759)
NetU_41: U.41 X_lines.9 | length 62
  Top Layer w0.15: U.41 139.58,109.216 139.667,109.128 139.667,109.126 140.462,108.331 141.351,108.331 141.478,108.204 141.732,108.204 143.256,106.68 146.177,106.68 v1(146.685,106.172)
  Bottom Layer w0.15: X_lines.9 141.859,81.407 146.812,86.36 156.083,86.36 157.936,88.213 157.936,94.869 157.838,94.967 157.838,101.623 157.607,101.854 157.607,104.14 157.734,104.267 157.734,107.442 157.226,107.95 149.987,107.95 148.209,106.172 v1(146.685,106.172)
NetU_42: U.42 X_lines.10 | length 59.7
  Top Layer w0.15: U.42 139.71,109.716 140.691,108.735 141.772,108.735 142.811,107.696 v1(144.526,107.696)
  Bottom Layer w0.15: X_lines.10 144.653,79.121 150.749,85.217 150.788,85.178 155.917,85.178 158.34,87.601 158.34,95.036 158.242,95.134 158.242,103.09 158.496,103.344 158.496,107.823 157.48,108.839 149.86,108.839 148.59,107.569 144.653,107.569 v1(144.526,107.696)
NetU_43: U.43 X_lines.11 | length 60.1
  Top Layer w0.15: U.43 139.781,110.216 140.858,109.139 142.732,109.139 v1(142.763,109.108)
  Bottom Layer w0.15: v1(142.763,109.108) 143.066,109.108 143.514,108.66 145.594,108.66 145.923,108.331 148.463,108.331 149.479,109.347 158.115,109.347 158.981,108.481 158.981,105.179 160.632,103.528 160.632,88.877 156.21,84.455 152.273,84.455 X_lines.11
NetU_44: U.44 X_lines.12 | length 59.8
  Top Layer w0.15: U.44 139.853,110.716 140.46,110.109 141.224,110.109 v1(141.238,110.123)
  Bottom Layer w0.15: v1(141.238,110.123) 141.351,110.236 143.637,110.236 144.145,109.728 144.78,109.728 145.161,109.347 147.32,109.347 147.447,109.22 148.209,109.22 149.098,110.109 158.242,110.109 159.385,108.966 159.385,106.045 161.036,104.394 161.036,91.694 161.163,91.567 161.163,87.503 157.607,83.947 154.305,83.947 X_lines.12
NetU_61: U.61 Y_Lines.7 | length 102.4
  Top Layer w0.15: v1(123.444,124.079) 130.592,116.931 U.61
  Bottom Layer w0.15: Y_Lines.7 101.178,104.435 102.067,104.435 102.743,103.759 102.743,101.981 103.886,100.838 103.886,98.044 104.521,97.409 104.521,93.98 103.124,92.583 97.028,92.583 94.996,94.615 94.996,128.778 97.409,131.191 116.332,131.191 v1(123.444,124.079)
NetU_62: U.62 Y_Lines.8 | length 89.7
  Top Layer w0.15: v1(121.539,122.301) 127,116.84 129.921,116.84 130.092,116.669 U.62
  Bottom Layer w0.15: Y_Lines.8 102.489,100.584 102.87,100.584 103.251,100.203 103.251,94.488 102.489,93.726 98.044,93.726 96.139,95.631 96.139,118.237 96.1,118.276 96.1,126.492 96.139,126.492 98.425,128.778 115.062,128.778 v1(121.539,122.301)
NetU_63: U.63 Y_Lines.9 | length 79.2
  Top Layer w0.15: v1@121.158,120.142 v1(121.285,120.015) 121.92,120.015 125.73,116.205 129.413,116.205 129.592,116.026 U.63
  Bottom Layer w0.15: Y_Lines.9 101.259,99.441 101.865,98.835 102.333,98.835 102.681,98.487 102.681,98.363 102.489,98.171 102.489,95.631 101.981,95.123 101.981,94.83 101.893,94.742 98.552,94.742 97.028,96.266 97.028,124.841 98.552,126.365 111.506,126.365 117.856,120.015 v1(121.285,120.015)
NetU_64: U.64 Y_Lines.10 | length 64.3
  Top Layer w0.15: v1@121.031,117.983 123.063,117.983 125.245,115.801 129.004,115.801 129.092,115.713 U.64
  Bottom Layer w0.15: Y_Lines.10 99.314,96.901 97.79,98.425 97.79,122.301 98.425,122.936 106.426,122.936 112.268,117.094 118.999,117.094 119.634,117.729 v1(121.285,117.729)
VCC: C1.1 C4.1 C5.1 C6.1 CbpOUT.1 L1.2 LDO.5 LED.1 Rpull.1 SWD.1 U.21 U.34 U.48 U.56 | length 211.5
  Top Layer w0.15: L1.2 111.788,101.953 122.809,90.932 130.556,90.932 130.846,91.222 ; v1@130.556,124.714 131.699,124.714 132.334,125.349 SWD.1 ; U.21 131.064,103.268 131.064,95.758 ; C4.1 131.064,93.345 ; C5.1 131.064,95.758 ; U.56 133.092,118.487 135.763,121.158 v1(140.462,121.158) ; U.34 139.775,105.716 140.208,105.283 140.208,101.346 ; U.48 145.228,112.716 146.05,113.538 v1(146.177,113.538) 146.177,111.853 152.4,105.63 152.4,95.758 150.937,94.295 143.51,94.295 143.444,94.295 ; C1.1@139.954,99.592 C1.1@140.208,99.338 ; C6.1 140.347,99.199 C1.1@140.208,99.338 ; v1(152.019,111.506) v1@152.527,111.506 ; Rpull.1 162.687,97.663 161.544,98.806 161.544,103.659 161.632,103.747 CbpOUT.1 ; LDO.5 162.875,106.045 ; LED.1@166.37,113.157 LED.1 166.243,106.934 165.354,106.045 162.875,106.045 ; v1(167.005,104.775) 165.977,103.747 CbpOUT.1 ; 130.846,91.222 131.064,91.44 131.064,93.345 ; 130.846,91.222 137.298,91.222 140.371,94.295 143.444,94.295 ; 131.064,93.345 131.064,95.758 ; C1.1@140.208,99.338 140.208,101.346 ; 140.208,101.346 143.422,101.346 143.51,101.258 143.51,94.361 143.444,94.295 ; 162.875,106.045 162.941,105.979 CbpOUT.1
  Bottom Layer w0.15: v1(130.302,124.714) 130.302,123.317 130.556,123.063 139.954,123.063 140.335,122.682 140.335,121.285 v1(140.462,121.158) 140.462,119.253 v1(146.177,113.538) 147.354,113.538 148.445,112.447 151.078,112.447 v1(152.019,111.506) 165.354,111.506 166.878,109.982 166.878,104.902 v1(167.005,104.775)
pads on no net: LDO.4 P. P.4 P.6 P.7 P.8 P.9 SWD.6 SWD.7 SWD.8 SWD.9 U.5 U.6 U.9 U.10 U.11 U.12 U.23 U.24 U.31 U.32 U.39 U.40 U.49 U.50 U.51 U.53 U.59 U.60

## Polygon pours and split planes (outlines as drawn)
no net on Top Overlay "NONET_L-01_P-001" (solid): 129.032,142.875
GND on Top Layer "NONET_L-01_P-001" (solid, remove dead copper, pour order 11): 94.234,137.414 96.52,139.7 167.386,139.7 169.545,137.541 169.545,73.533 168.275,72.263 140.589,72.263 140.462,72.263 140.335,72.263 95.758,72.263 94.234,73.787 94.234,89.789
GND on Bottom Layer "NONET_L-01_P-001" (solid, remove dead copper, pour order 12): 94.234,137.414 96.52,139.7 167.386,139.7 169.545,137.541 169.545,73.533 168.275,72.263 140.589,72.263 140.462,72.263 140.335,72.263 95.758,72.263 94.234,73.787 94.234,89.789

## Other copper
Top Layer:
  pour cut-out: 104.775,94.615

## Silkscreen, mask and mechanical layers (free items; w line width, h text height)
Top Overlay:
  lines w0.254: 170.307,137.16 170.307,137.795 167.767,140.335 122.047,140.335 96.393,140.335 93.726,137.668 93.726,73.66 95.631,71.755 168.656,71.755 170.307,73.406 170.307,73.787 170.307,93.853 170.307,137.477
  text "PA12" at 156.187,135.786 h1 r90
  text "PA13" at 148.44,135.532 h1 r90
  text "SAMD21_16x10" at 96.266,84.709 h1.52
  text "Version: 1.0" at 96.139,81.915 h1.52
  text "Author: MSS" at 96.393,78.867 h1.52
  text "Date: 6th Nov '20" at 94.615,75.819 h1.52

## Text inside footprints (layer, text, board x,y; h text height)
LDO: Top Overlay "*" at 163.256,112.16 h1.27 r270; Mechanical 13 "*" at 162.164,111.15 h1.27 r270
SWD: Mechanical 1 "J1" at 134.439,129.096 h0.64